# Altium PCB PCB.PcbDoc
Units mm, origin at the board's own origin, x right, y up, seen from the top; angles counter-clockwise.
Board outline 35 x 26 mm, 4 copper layers (Top Layer, Mid Layer 1, Mid Layer 2, Bottom Layer), stack 1.57 mm thick; 62 components, 30 nets, 174 pads, 81 vias.
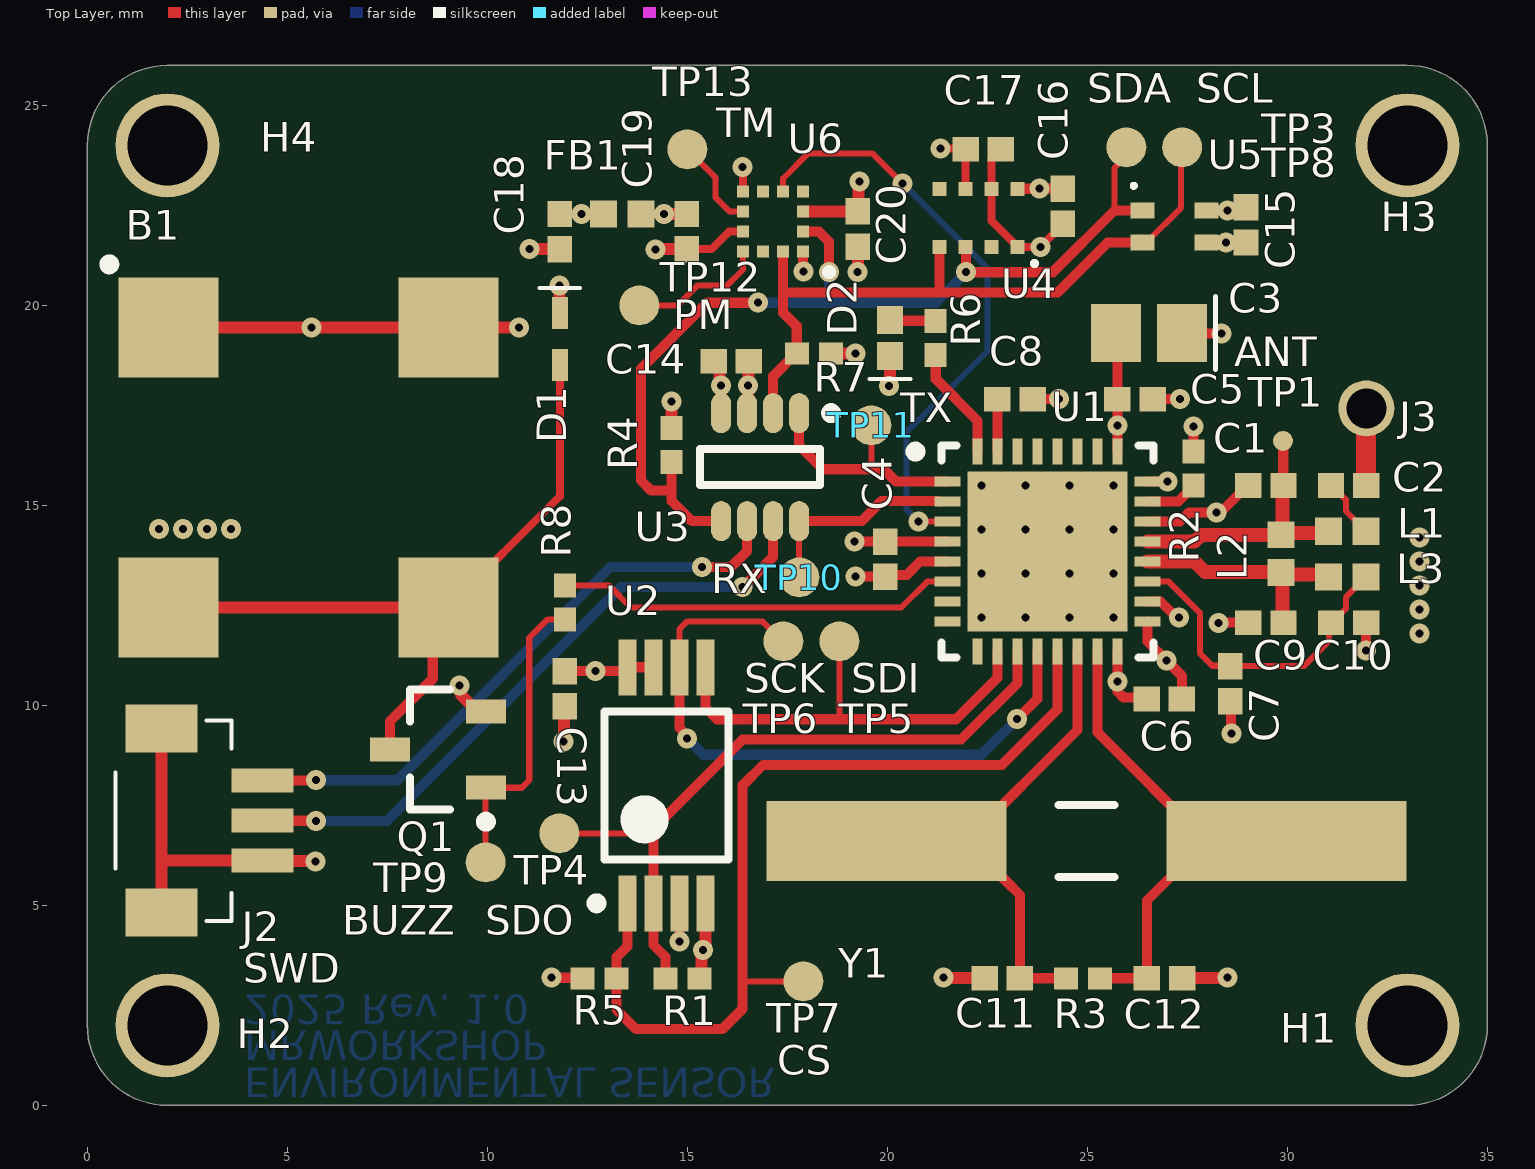
[diagram p0: Top Layer view]
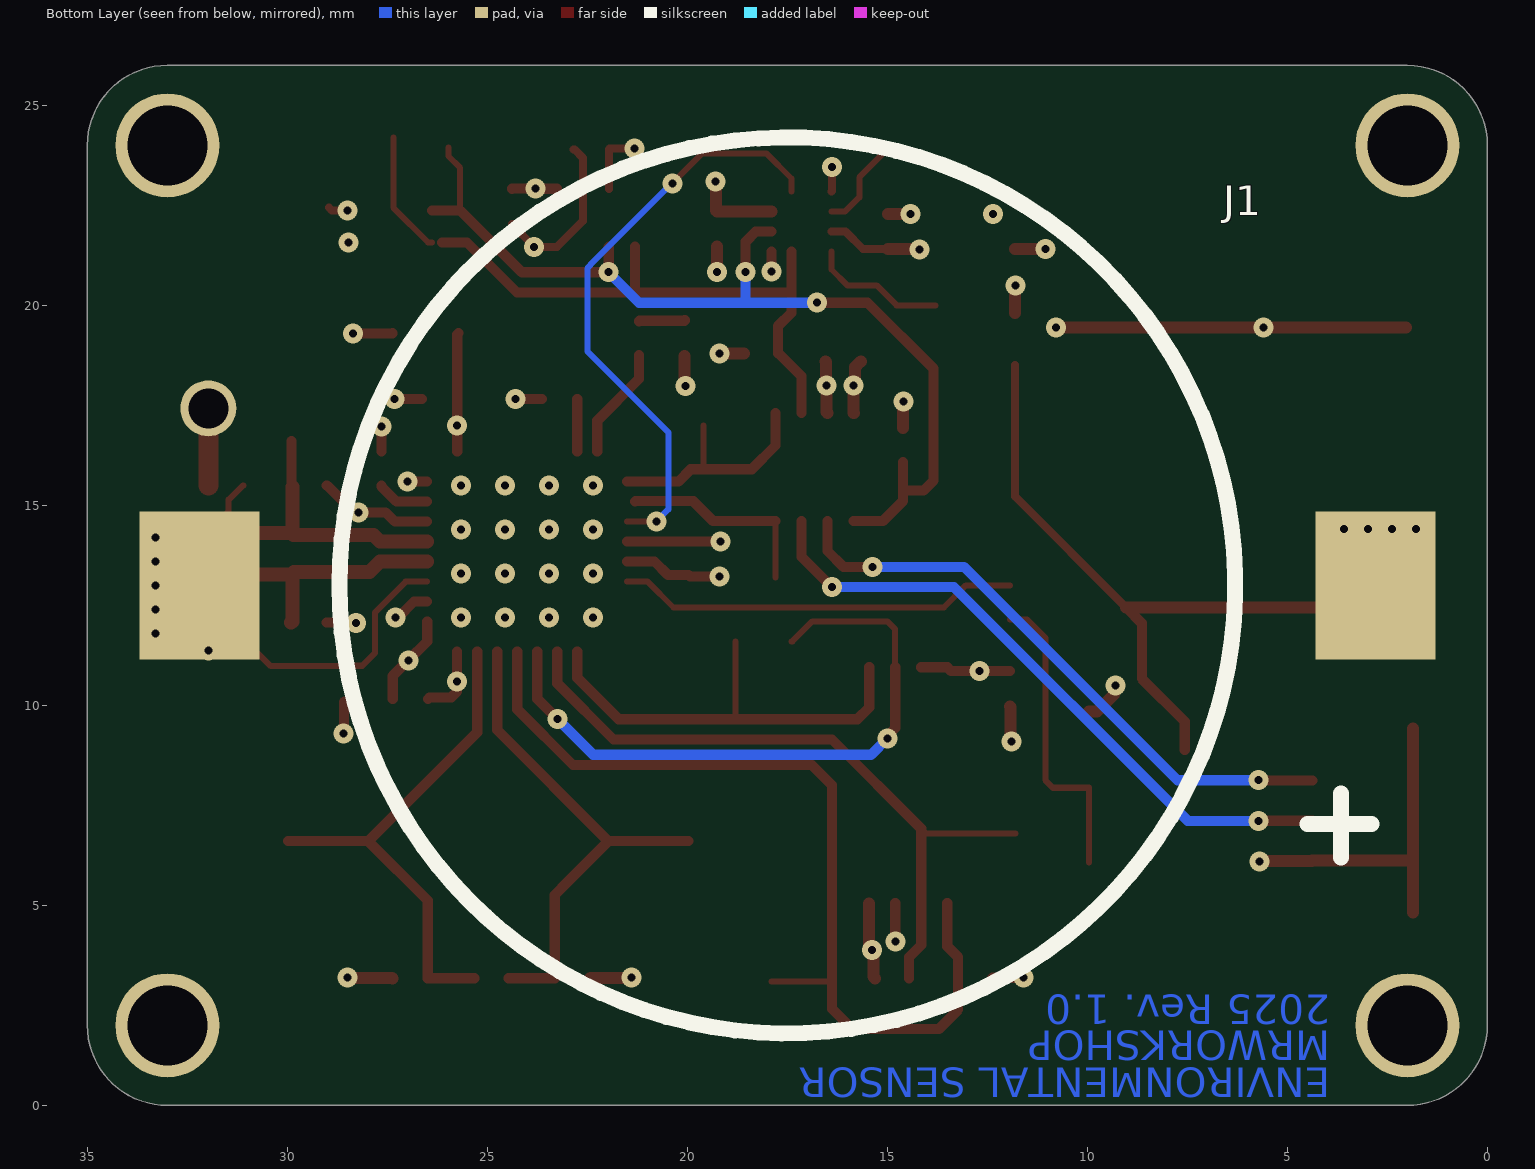
[diagram p1: Bottom Layer view, seen from below]
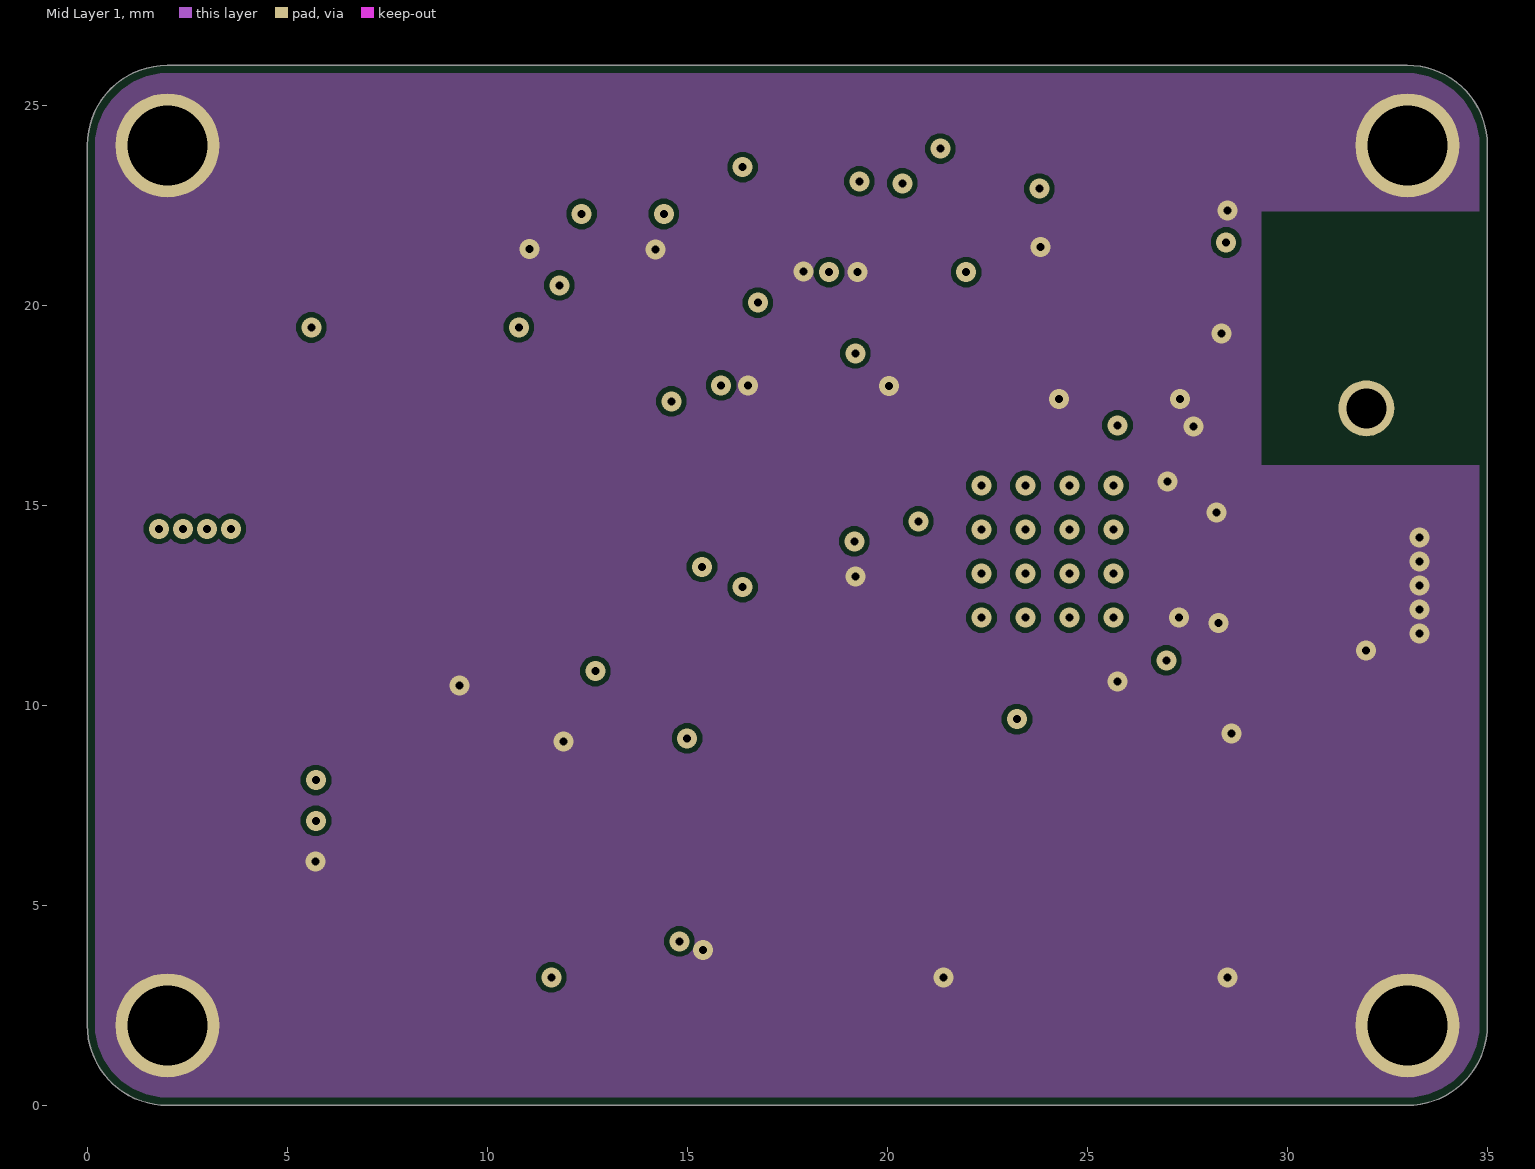
[diagram p2: Mid Layer 1]
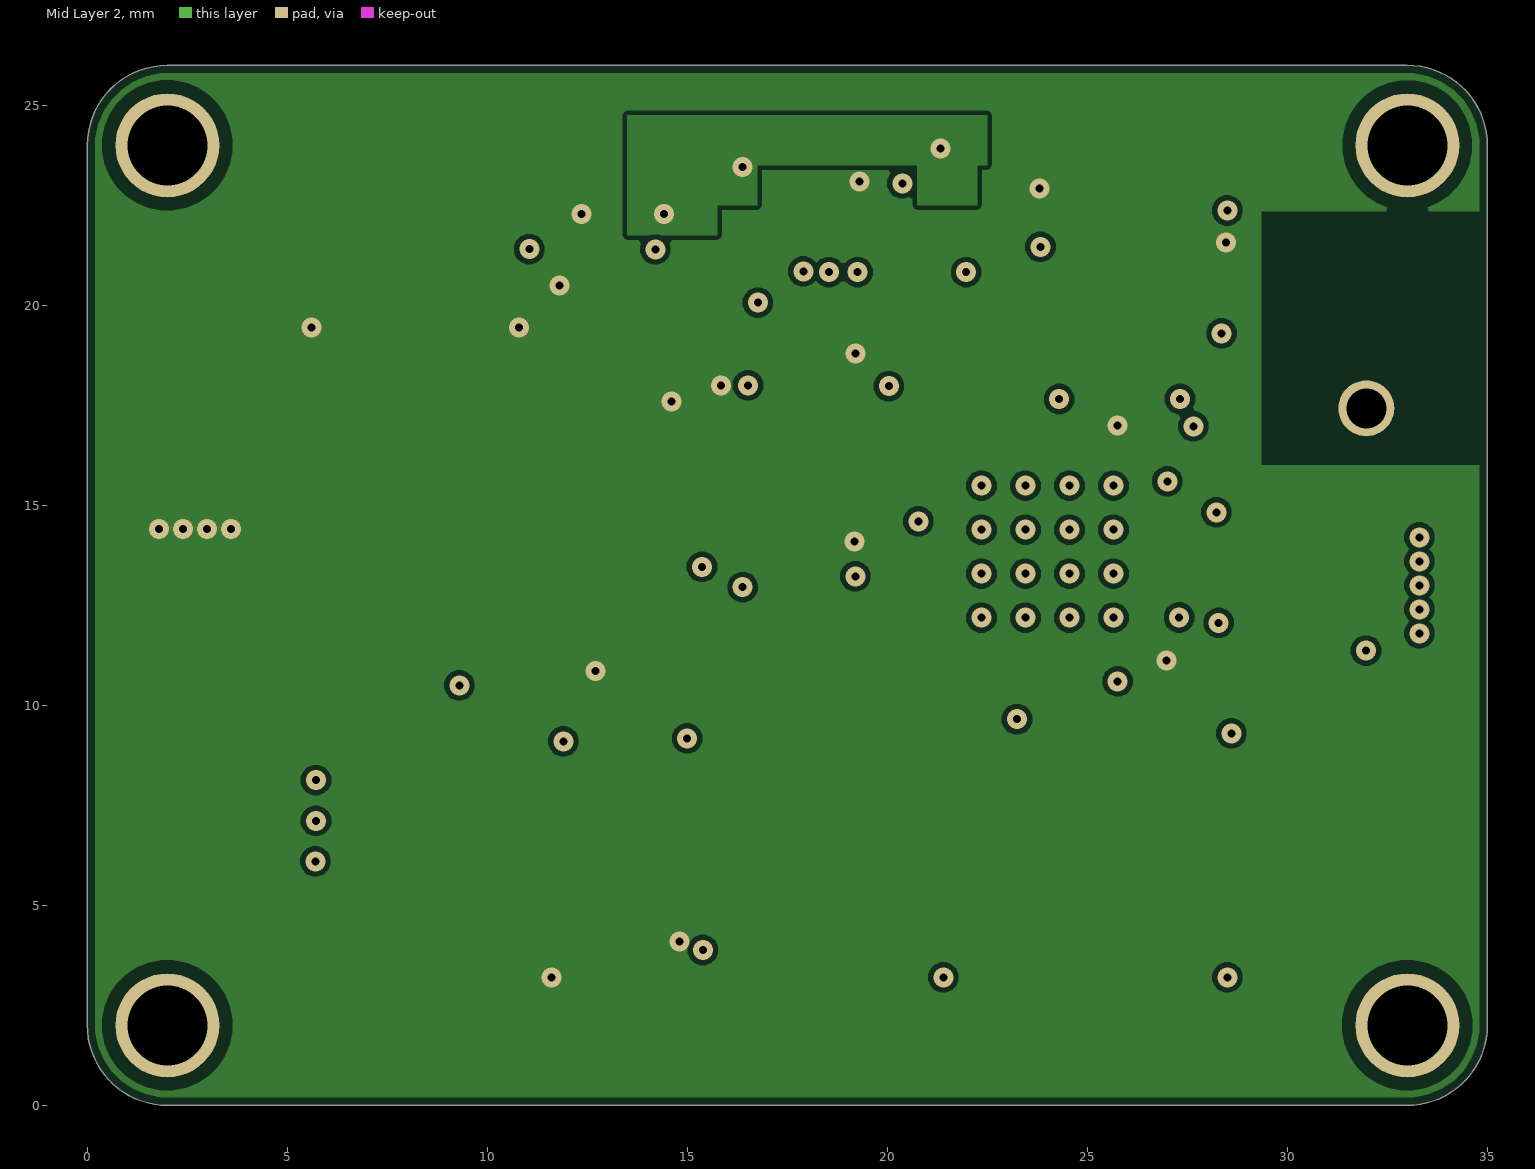
[diagram p3: Mid Layer 2]
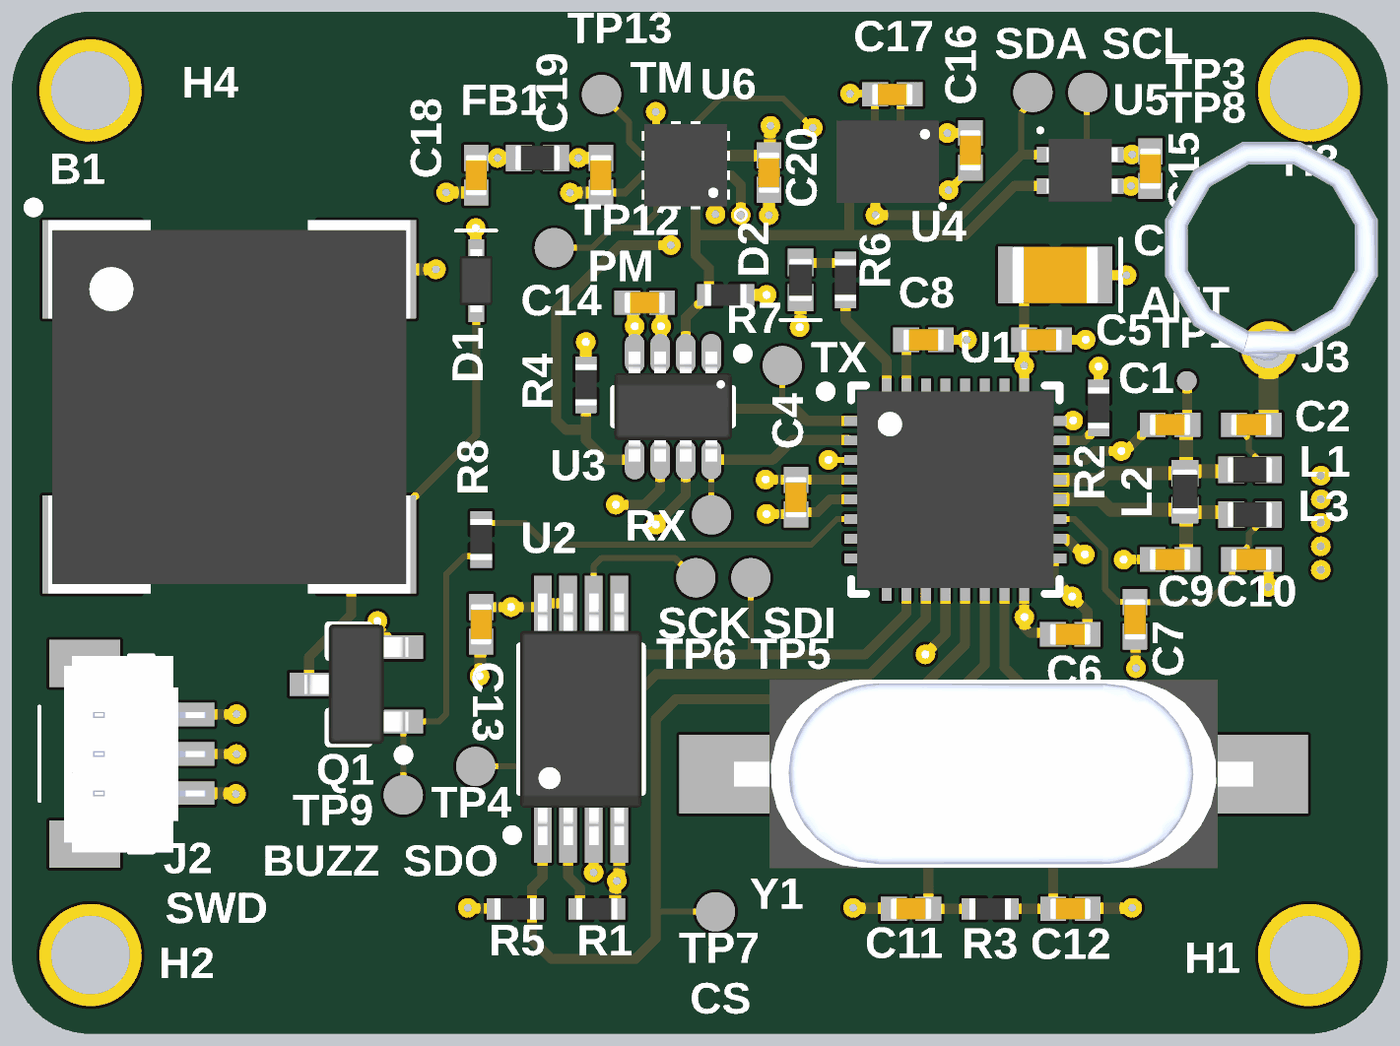
[diagram p4: 3D render of the assembled board from above, using the file's embedded part models]

## Layer stack, top to bottom
Top Solder: solder mask 0.0127, Solder Resist, Dk 3.8
Top Layer: signal copper 0.035
Dielectric 1: prepreg 0.1, 2313, Dk 4.05
Mid Layer 1: signal copper 0.0175
Core: core 1.265, FR-4, Dk 4.5
Mid Layer 2: signal copper 0.0175
Dielectric 2: prepreg 0.1, 2313, Dk 4.05
Bottom Layer: signal copper 0.035
Bottom Solder: solder mask 0.0127, Solder Resist, Dk 3.8

## Board outline
0,2 ccw(c2,2) 2,0 33,0 ccw(c33,2) 35,2 35,24 ccw(c33,24) 33,26 2,26 ccw(c2,24) 0,24

## Design rules (kind name [scope] priority, off if disabled: settings)
BoardOutlineClearance [All] p1: gap=0.2 ignorepadtopadclearanceinfootprint=FALSE
Clearance [All] p1: gap=0.102 ignorepadtopadclearanceinfootprint=FALSE except(0.127: Arc-Via Track-Via SMDPad-Via THPad-Via Via-Via Via-Fill Via-Poly Via-Region Via-Text; 0.25: Arc-Hole Track-Hole SMDPad-Hole THPad-Hole Via-Hole Fill-Hole Poly-Hole Region-Hole Text-Hole)
ComponentClearance [All] p1: gap=0.102 collisioncheckmode=3 verticalgap=0.102 showdistances=TRUE
DiffPairsRouting [All] p1: maxlimit=0.102 minlimit=0.102 mostfreqgap=0.102 toplayer_minwidth=0.102 toplayer_maxwidth=1816.048 toplayer_prefwidth=0.102 midlayer1_minwidth=0.102 midlayer1_maxwidth=1816.048 midlayer1_prefwidth=0.102 midlayer2_minwidth=0.102 midlayer2_maxwidth=1816.048 midlayer2_prefwidth=0.102 bottomlayer_minwidth=0.102 bottomlayer_maxwidth=1816.048 bottomlayer_prefwidth=0.102 maxuncoupledlength=12.7
Height [All] p1: minheight=0 maxheight=1816.048 prefheight=12.7
HoleSize [All] p1: absolutevalues=TRUE maxlimit=6.3 minlimit=0.2 maxpercent=80.000 minpercent=20.000
HoleToHoleClearance [All] p1: gap=0.25 allowstackedmicrovias=FALSE
MinimumAnnularRing [All] p1: minimumring=0.076
MinimumSolderMaskSliver [All] p1: minsoldermaskwidth=0
PlaneClearance [All] p1: clearance=0.102
PlaneConnect PlaneConnectPowerPads [InPadClass('PowerPads')] p1: planeconnectstyle=Direct reliefexpansion=0.508 reliefentries=4 reliefconductorwidth=0.254 reliefairgap=0.254
PlaneConnect [All] p2: pad.planeconnectstyle=Relief pad.reliefexpansion=0.3 pad.reliefentries=4 pad.reliefconductorwidth=0.102 pad.reliefairgap=0.102 via.planeconnectstyle=Direct via.reliefexpansion=0.3 via.reliefentries=4 via.reliefconductorwidth=0.127 via.reliefairgap=0.127
PolygonConnect PolygonConnectPowerPads [All vs (InPadClass('PowerPads'))] p1: connectstyle=Direct reliefconductorwidth=0.254 reliefentries=4 polygonreliefangle="90 Angle" airgapwidth=0.254
PolygonConnect [All] p2: thpad.connectstyle=Relief thpad.reliefconductorwidth=0.102 thpad.reliefentries=4 thpad.polygonreliefangle="90 Angle" thpad.airgapwidth=0.102 smdpad.connectstyle=Relief smdpad.reliefconductorwidth=0.102 smdpad.reliefentries=4 smdpad.polygonreliefangle="90 Angle" smdpad.airgapwidth=0.102 via.connectstyle=Direct via.reliefconductorwidth=0.127 via.reliefentries=4 via.polygonreliefangle="90 Angle" via.airgapwidth=0.127
RoutingVias [All] p1: holewidth=0.2 width=0.45 viastyle="Through Hole" minholewidth=0.2 minwidth=0.45 maxholewidth=6.3 maxwidth=6.55
SilkToSilkClearance [All] p1: silktosilkclearance=0
SilkToSolderMaskClearance [IsPad] p1: minsilkscreentomaskgap=0.102 clearancetoexposedcopper=TRUE
SolderMaskExpansion [All] p1: expansion=0.075 istentingtop=FALSE
SupplyNets "Schematic Supply Nets_3" [InNet('+3V')] p1: voltage=0.000
SupplyNets "Schematic Supply Nets_2" [InNet('GND')] p2: voltage=0.000
SupplyNets "Schematic Supply Nets_1" [InNet('VDDA')] p3: voltage=0.000
Width [All] p1: maxlimit=1816.048 minlimit=0.102 preferedwidth=0.102
20 further rules are at their usual default settings.

## Components (designator, comment, footprint, x,y, rotation, side; value= is the part's Value field where it differs from the comment)
B1 "CMT-8504-03-SMT-TR" CMT-8504-03-SMT-TR 5.532,15.946 r0 top
C1 "GRM1555C2A180FA01D" C_0402 29.464,15.494 r0 top value=18pF
C2 "GRM1555C2A6R8DA01D" C_0402 31.531,15.494 r0 top value=6.8pF
C3 "TMCP0J475MTRF" C_0805_Polarized 26.543,19.304 r0 top value=4.7uF
C4 "GRM155R61A104KA01J" C_0402 19.95,13.65 r90 top
C5 "GRM155R61A104KA01J" C_0402 26.193,17.653 r180 top
C6 "GRM155R61A104KA01J" C_0402 26.924,10.16 r0 top
C7 "GRM1557U1A332JA01D" C_0402 28.575,10.541 r90 top value=3.3nF
C8 "GRM155R70J103KA01D" C_0402 23.193,17.653 r180 top value=10nF
C9 "GRM1555C2A180FA01D" C_0402 29.464,12.065 r0 top value=18pF
C10 "GRM1555C1H181JA01J" C_0402 31.531,12.065 r0 top value=180pF
C11 "GRM1555C1E300GA01D" C_0402 22.875,3.175 r0 top value=30pF
C12 "GRM1555C1E300GA01D" C_0402 26.931,3.175 r180 top value=30pF
C13 "GRM155R61A104KA01J" C_0402 11.938,10.414 r90 top
C14 "GRM155R61A104KA01J" C_0402 16.1,18.6 r180 top
C15 "GRM155R61A104KA01J" C_0402 28.964,22.011 r270 top
C16 "GRM155R61A104KA01J" C_0402 24.384,22.479 r90 top
C17 "GRM155R61A104KA01J" C_0402 22.4,23.9 r180 top
C18 "GRM155R61A104KA01J" C_0402 11.811,21.844 r90 top
C19 "GRM155R61A104KA01J" C_0402 14.986,21.844 r90 top
C20 "GRM155R61A104KA01J" C_0402 19.263,21.908 r90 top
D1 "BAS716,115" SOD523 11.811,19.162 r270 top
D2 "150040RS73240" LED_0402 20.066,19.177 r90 top value=RED
FB1 "BLM15PE471SH1D" L_0402 13.373,22.284 r0 top value=470R
H1 "Mounting_Hole_M2" M2 33,2 r0 top
H2 "Mounting_Hole_M2" M2 2,2 r0 top
H3 "Mounting_Hole_M2" M2 33,24 r0 top
H4 "Mounting_Hole_M2" M2 2,24 r0 top
J1 "SMTU2032-LF.TR" SMTU2032-LF.TR 17.5,13 r0 bottom locked
J2 "BM03B-SRSS-TB(LF)(SN)" BM03B-SRSS-TBT(LF)(SN) 2.032,7.112 r270 top
J3 "Antenna" Antenna_1mm 31.975,17.425 r345 top
L1 "MCLA1005V2-390-R" L_0402 31.496,14.351 r180 top value=39nH
L2 "PE-0402CL120JTT" L_0402 29.845,13.792 r90 top value=12nH
L3 "MCLA1005V2-390-R" L_0402 31.496,13.208 r180 top value=39nH
Q1 "BC850CLT1G" SOT23-3 8.763,8.89 r180 top
R1 "CR0402-FX-4702GLF" R_0402 14.88,3.175 r180 top value=47k
R2 "CR0402-FX-2202GLF" R_0402 27.651,15.919 r270 top value=22k
R3 "CR0402-FX-1004GLF" R_0402 24.892,3.175 r0 top value=1M
R4 "CR0402-FX-4702GLF" R_0402 14.605,16.51 r90 top value=47k
R5 "CR0402-FX-4702GLF" R_0402 12.804,3.175 r180 top value=47k
R6 "CR0402-FX-1001GLF" R_0402 21.209,19.177 r270 top value=1k
R7 "CR0402-FX-4702GLF" R_0402 18.161,18.796 r0 top value=47k
R8 "CR0402-FX-1800GLF" R_0402 11.938,12.573 r270 top value=180R
TP1 "TestPoint_0.5mm" TestPoint_0.5mm 29.891,16.61 r90 top
TP3 "TestPoint_1mm" TestPoint_1mm 25.975,23.95 r90 top
TP4 "TestPoint_1mm" TestPoint_1mm 11.8,6.8 r90 top
TP5 "TestPoint_1mm" TestPoint_1mm 18.8,11.6 r90 top
TP6 "TestPoint_1mm" TestPoint_1mm 17.4,11.6 r90 top
TP7 "TestPoint_1mm" TestPoint_1mm 17.9,3.1 r90 top
TP8 "TestPoint_1mm" TestPoint_1mm 27.371,23.95 r90 top
TP9 "TestPoint_1mm" TestPoint_1mm 9.957,6.073 r90 top
TP10 "TestPoint_1mm" TestPoint_1mm 17.8,13.2 r90 top
TP11 "TestPoint_1mm" TestPoint_1mm 19.6,17 r90 top
TP12 "TestPoint_1mm" TestPoint_1mm 13.8,20 r90 top
TP13 "TestPoint_1mm" TestPoint_1mm 15,23.9 r90 top
U1 "nRF9E5" QFN32L 24.003,13.843 r0 top
U2 "25AA320A-I/ST" TSSOP8 14.478,8.001 r90 top
U3 "MSPM0C1103SDDFR" SOT-23_8 16.82,15.955 r270 top
U4 "DPS310XTSA1" LGA-8L 22.281,22.188 r270 top
U5 "SHT40-BD1B-R2" DFN-SHT4 27.178,21.971 r0 top
U6 "MC6470" QFN12 17.145,22.098 r180 top
Y1 "FOXSDLF/040" Crystal_11.7x5.0 24.975,6.604 r0 top value=4MHz

## Footprints (in the part's own frame and the unit in brackets; to place one, negate y for a bottom-side part, rotate by r counter-clockwise, add the part's x,y. Pads: shape width x height; smd on the part's side, far side on the other; paste and mask are expansions set on the pad)
Antenna_1mm [mm]
  round 1.4 hole 1: 1(0,0)
  body extent -3.4,-0.3 2.2,5.3, height 10.9
BM03B-SRSS-TBT(LF)(SN) [mm]
  rect 1.2x1.8 smd: 0(-2.308,-0.18) 0(2.292,-0.18)
  rect 0.6x1.55 smd: 1(-1.008,2.345) 2(-0.008,2.345) 3(0.992,2.345)
  silkscreen extent -2.51,-1.33 2.5,1.57, body extent -2.5,-0.7 2.5,2.9, height 4.25
C_0402 [mm] "Chip Capacitor, 2-Leads, Body 1.00x0.50mm, IPC Medium Density"
  rect 0.66x0.62 smd: 1(-0.44,0) 2(0.44,0)
  body extent -0.53,-0.28 0.53,0.28, height 0.55
C_0805_Polarized [mm]
  rect 1.25x1.45 smd: 1(-0.825,0) 2(0.825,0)
  silkscreen extent 1.66,-0.91 1.66,0.91, body extent -1.1,-0.72 1.1,0.72, height 1.2
CMT-8504-03-SMT-TR [mm]
  rect 2.5x2.5 smd: +(-3.5,3.5) +(3.5,3.5) -(-3.5,-3.5) -(3.5,-3.5)
  silkscreen extent -5.11,4.95 -4.86,5.2, body extent -4.6,-4.75 4.6,4.75, height 4.5
Crystal_11.7x5.0 [mm]
  rect 6x2 smd: 1(-5,0) 2(5,0)
  silkscreen extent -0.7,-0.9 0.7,0.9, body extent -6.6,-2.39 6.6,2.41, height 4.3
DFN-SHT4 [mm] "DFN, 4-Leads, Body 1.50x1.50mm, Pitch 1.40mm, IPC Medium Density"
  rect 0.6x0.4 smd: 1(-0.8,0.4) 2(-0.8,-0.4) 3(0.8,-0.4) 4(0.8,0.4)
  silkscreen extent -1.07,0.97 -0.97,1.07, body extent -0.85,-0.8 0.95,0.8, height 0.59
L_0402 [mm]
  rect 0.67x0.68 smd: 1(-0.47,0) 2(0.47,0)
  body extent -0.58,-0.33 0.58,0.33, height 0.65
LED_0402 [mm]
  rect 0.7x0.65 smd: 1(-0.45,0) 2(0.45,0)
  silkscreen extent -1.02,-0.51 -1.02,0.51, body extent -0.55,-0.3 0.55,0.3, height 0.5
LGA-8L [mm] "LGA, 8-Leads, Body 2.00x2.50mmx1.00mm, Pitch 0.65mm"
  rect 0.35x0.35 smd: 1(0.725,0.975) 2(0.725,0.325) 3(0.725,-0.325) 4(0.725,-0.975) 5(-0.725,-0.975) 6(-0.725,-0.325) 7(-0.725,0.325) 8(-0.725,0.975)
  silkscreen extent 1.13,1.38 1.16,1.41, body extent -1.05,-1.3 1.05,1.3, height 1
M2 [mm]
  round 2.6 hole 2: 1(0,0)
QFN12 [mm] "QFN, 12-Leads, Body 2.00x2.00mm, Pitch 0.50mm, IPC Medium Density"
  rect 0.3x0.3 smd: 1(-0.75,0.75) 2(-0.75,0.25) 3(-0.75,-0.25) 4(-0.75,-0.75) 5(-0.25,-0.75) 6(0.25,-0.75) 7(0.75,-0.75) 8(0.75,-0.25) 9(0.75,0.25) 10(0.75,0.75) 11(0.25,0.75) 12(-0.25,0.75)
  silkscreen extent -1.45,1.22 -1.35,1.32, body extent -1.12,-1.12 1.12,1.12, height 1
QFN32L [mm] "QFN, 32-Leads, Body 5.00x5.00mm, Pitch 0.50mm, Thermal Pad 4.00x4.00mm, IPC Medium Density"
  rect 0.65x0.25 smd: 1(-2.5,1.75) 2(-2.5,1.25) 3(-2.5,0.75) 4(-2.5,0.25) 5(-2.5,-0.25) 6(-2.5,-0.75) 7(-2.5,-1.25) 8(-2.5,-1.75) 17(2.5,-1.75) 18(2.5,-1.25) 19(2.5,-0.75) 20(2.5,-0.25) 21(2.5,0.25) 22(2.5,0.75) 23(2.5,1.25) 24(2.5,1.75)
  rect 0.25x0.65 smd: 9(-1.75,-2.5) 10(-1.25,-2.5) 11(-0.75,-2.5) 12(-0.25,-2.5) 13(0.25,-2.5) 14(0.75,-2.5) 15(1.25,-2.5) 16(1.75,-2.5) 25(1.75,2.5) 26(1.25,2.5) 27(0.75,2.5) 28(0.25,2.5) 29(-0.25,2.5) 30(-0.75,2.5) 31(-1.25,2.5) 32(-1.75,2.5)
  rect 4x4 smd: 33(0,0)
  silkscreen extent -3.42,-2.65 2.65,2.65, body extent -2.5,-2.5 2.5,2.5, height 0.9
R_0402 [mm]
  rect 0.6x0.55 smd: 1(-0.425,0) 2(0.425,0)
  body extent -0.53,-0.28 0.53,0.28, height 0.37
SMTU2032-LF.TR [mm]
  rect 3x3.7 smd: 1(-14.7,0) 2(14.7,0)
  silkscreen extent -14.6,-11.2 11.2,11.2, body extent -16,-8.05 16,8.05, height 5.55
SOD523 [mm] "SODFL, 2-Leads, Body 0.80x1.60mm, IPC Medium Density"
  rect 0.8x0.4 smd: 1(-0.65,0) 2(0.65,0)
  silkscreen extent -1.27,-0.51 -1.27,0.51, body extent -0.8,-0.43 0.8,0.43, height 0.65
SOT23-3 [mm] "SOT23, 3-Leads, Body 2.92x2.37mm, Pitch 0.95mm, IPC Medium Density"
  rect 1x0.6 smd: 1(-1.2,0.95) 2(-1.2,-0.95) 3(1.2,0)
  silkscreen extent -1.33,-1.5 0.7,1.92, body extent -1.32,-1.52 1.32,1.52, height 1.12
SOT-23_8 [mm]
  oval 1x0.5 smd: 1(-1.35,0.975) 2(-1.35,0.325) 3(-1.35,-0.325) 4(-1.35,-0.975) 5(1.35,-0.975) 6(1.35,-0.325) 7(1.35,0.325) 8(1.35,0.975)
  silkscreen extent -1.47,-1.5 0.45,1.9, body extent -1.4,-1.5 1.4,1.5, height 1.1
TestPoint_0.5mm [mm]
  round 0.5 smd: 1(0,0)
TestPoint_1mm [mm]
  round 1 smd: 1(0,0)
TSSOP8 [mm] "TSOP, 8-Leads, Body 3.00x4.40mm, Pitch 0.65mm, IPC Medium Density"
  rect 1.4x0.45 smd: 1(-2.95,0.975) 2(-2.95,0.325) 3(-2.95,-0.325) 4(-2.95,-0.975) 5(2.95,-0.975) 6(2.95,-0.325) 7(2.95,0.325) 8(2.95,0.975)
  silkscreen extent -3.07,-1.55 1.85,1.87, body extent -3.2,-1.55 3.2,1.55, height 1.2

## Part data
B1: "Piezo Buzzers & Audio Indicators 8.5mmx4mm 3 V, 85 dB, Surface Mount, Transducer", Supplier Part Number 1=2223-CMT-8504-03-SMT-TRCT-ND, Supplier 1=Digikey
C1 C9: "Multilayer Ceramic Capacitors MLCC - SMD/SMT 18 pF 100 VDC 1% 0402 C0G (NP0)", Supplier Part Number 1=81-GRM1555C2A180FA1D, Tolerance=1%, Voltage=100V, Supplier 1=Mouser
C2: "Multilayer Ceramic Capacitors MLCC - SMD/SMT 6.8 pF 100 VDC 0.5 pF 0402 C0G (NP0)", Supplier Part Number 1=81-GRM1555C2A6R8DA1D, Voltage=100V, Supplier 1=Mouser
C3: "Tantalum Capacitors - Solid SMD 7volts 4.7uF 20% Molded Case, 0805", Supplier Part Number 1=74-TMCP0J475MTRF, Tolerance=20%, Voltage=6.3V, Supplier 1=Mouser
C4 C5 C6 C13 C14 C15 C16 C17 C18 C19 C20: "Multilayer Ceramic Capacitors MLCC - SMD/SMT 0.1 uF 10 VDC 10% 0402 X5R", Capacitance=100nF, Supplier Part Number 1=81-GRM15R61A104KA01J, Tolerance=10%, Voltage=10V, Supplier 1=Mouser
C7: "Multilayer Ceramic Capacitors MLCC - SMD/SMT 3300 pF 10 VDC 5% 0402 U2J", Supplier Part Number 1=81-GRM1557U1A332JA1D, Tolerance=5%, Voltage=10V, Supplier 1=Mouser
C8: "Multilayer Ceramic Capacitors MLCC - SMD/SMT 0.01 uF 6.3 VDC 10% 0402 X7R", Supplier Part Number 1=81-GRM155R70J103KA1D, Tolerance=10%, Voltage=6.3V, Supplier 1=Mouser
C10: "Multilayer Ceramic Capacitors MLCC - SMD/SMT 180 pF 50 VDC 5% 0402 C0G (NP0)", Supplier Part Number 1=81-GRM1555C1H181JA1J, Tolerance=5%, Voltage=50V, Supplier 1=Mouser
C11 C12: "Multilayer Ceramic Capacitors MLCC - SMD/SMT 30 pF 25 VDC 2% 0402 C0G (NP0)", Supplier Part Number 1=81-GRM1555C1E300GA1D, Tolerance=2%, Voltage=25V, Supplier 1=Mouser
D1: "Rectifiers BAS716/SOD523/SC-79", Supplier Part Number 1=1661367, If=200mA, Supplier 1=Rs, Vf=0.92V, VRRM=75V
D2: "Single Colour LEDs WL-SMCC SMD MonoChip LED 0402 Red 630nm", Supplier Part Number 1=1766150, Supplier 1=Rs
FB1: "Ferrite Beads 470 OHM 25%", Supplier Part Number 1=81-BLM15PE471SH1D, Tolerance=25%, IDC=750mA, RDC=370mR, Supplier 1=Mouser
J1: "Coin Cell Battery Holders SFC MNT FOR CR2032 485PCS/REEL", Supplier Part Number 1=614-SMTU2032-LF.TR, Supplier 1=Mouser
J2: "Złącze: przewód-płytka; gniazdo; męskie; SH,SR; 1mm; PIN: 3; SMT; 50V", Supplier Part Number 1=BM03B-SRSS-TBT(LF)(SN), Supplier 1="Arrow Electronics"
L1 L3: "RF Inductors - SMD MCLA Auto Chip IND 1005 39nH 2 Pads", Supplier Part Number 1=504-MCLA1005V2-390-R, IDC=200mA, Q=8, RDC=1R, SRF=1200MHz, Supplier 1=Mouser
L2: "RF Inductors - SMD 0402 12nH 300mA DCR=500mOhms RF", Supplier Part Number 1=553-PE-0402CL120JTTCT-ND, IDC=300mA, Q=8, RDC=0.5R, SRF=2700MHz, Supplier 1=Digikey
Q1: "Bipolar Transistors - BJT 100mA 50V NPN", Supplier Part Number 1=464259, Supplier 1=Rs
R1 R4 R5 R7: "Thick Film Resistors - SMD 47K OHM 1%", Power=62.5mW, Supplier Part Number 1=2477012, Tolerance=1%, Voltage=50V, Supplier 1=Rs
R2: "Thick Film Resistors - SMD 22K OHM 1%", Power=62.5mW, Supplier Part Number 1=2477003, Tolerance=1%, Voltage=50V, Supplier 1=Rs
R3: "Thick Film Resistors - SMD 1.0M OHM 1%", Power=62.5mW, Supplier Part Number 1=2476986, Tolerance=1%, Supplier 1=Rs
R6: "Thick Film Resistors - SMD 1.0K OHM 1%", Power=62.5mW, Supplier Part Number 1=2231667, Tolerance=1%, Supplier 1=Rs
R8: "Thick Film Resistors - SMD 180 OHM 1%", Power=62.5mW, Supplier Part Number 1=CR0402-FX-1800GLFCT-ND, Tolerance=1%, Supplier 1=Digikey
U1: library part nRF905, "RF Transceiver 1.9-3.6V 433/868/ 915MHz TRNSCVR", Supplier Part Number 1=8855794, Supplier 1=RS
U2: "EEPROM 32K 4KX8 1.8V SER EE IND", Supplier Part Number 1=25AA320AXT-I/STTR-ND, Supplier 1=Digikey
U3: "ARM Microcontrollers - MCU 24MHz Arm Cortex-M0+ MCU with 8KB flash", Supplier Part Number 1=595-MSPM0C1103SDDFR, Flash=8kB, Supplier 1=Mouser
U4: "Board Mount Pressure Sensors PRESSURE SENSOR & Temperature sensor", Supplier Part Number 1=726-DPS310XTSA1, Supplier 1=Mouser
U5: "Board Mount Humidity Sensors +/-1.8%RH/+/-0.2C, 4th generation, digital (I2C) humidity and temperature sensor with 0x45 I2C address.", Supplier Part Number 1=1649-SHT40-BD1B-R2CT-ND, Supplier 1=Digikey
U6: "IMUs - Inertial Measurement Units 8g, 14-Bit Output 6-Axis eCompass", Supplier Part Number 1=2548-MC6470CT-ND, Supplier 1=Digikey
Y1: "Crystals 4MHz 20pF", Load Capacitance=20pF, Supplier Part Number 1=2063966RL, Tolerance=50ppm, Supplier 1=Farnell

## Via types
v1: diameter 0.5, hole 0.2, Top Layer to Bottom Layer, 81 vias

## Nets (pads, with @x,y where several pads share a name; then routed paths per layer and width w, separated by ;. In a path a pad name is that pad's centre, name@x,y a point inside that pad or via, vN(x,y) a via of type N, cw(c..) or ccw(c..) an arc to the next point about the centre after c; other vN are vias at no path point)
+3V: B1.+ C3.1 C4.2 C5.2 C6.2 C13.2 C14.2 C15.2 C16.2 C18.2 C20.2 D1.1 FB1.1 J1.1 R4.2 R5.2 R7.2 U1.4 U1.17 U1.25 U2.3 U2.7 U2.8 U3.4 U4.8 U5.3 U6.3 | length 27
  Top Layer w0.254: v1(11.6,3.2) 11.612,3.188 12.366,3.188 R5.2 ; C13.2 v1(12.7,10.854) 13.406,10.854 U2.8 U2.7 ; v1(14.8,4.1) 14.802,4.102 14.802,5.05 U2.3 ; v1(19.175,14.1) 19.18,14.095 19.937,14.095 19.939,14.093 U1.4 ; U4.8 23.259,22.916 v1(23.8,22.916) 23.802,22.918 24.379,22.918 24.381,22.916 C16.2 ; C3.1 25.753,19.269 C5.2 v1(25.753,17) U1.25 ; U1.17 26.503,11.597 v1(26.975,11.125) 27.364,10.736 C6.2
  Top Layer w0.3: B1.+@2.032,19.446 v1(5.6,19.446) 9.032,19.446 10.787,19.446 v1(10.789,19.448) ; v1(11.8,20.5) 11.806,20.494 11.806,19.817 D1.1 ; v1(14.6,17.6) 14.603,17.597 14.603,16.937 R4.2 ; C14.2 15.807,18.453 15.807,18.038 v1(15.845,18) U3.4 U3.4@15.839,17.311 ; U6.3 C20.2 19.282,22.366 19.282,23.082 v1(19.3,23.1) ; R7.2 18.588,18.798 19.198,18.798 v1(19.2,18.8)
  other v1: 1.787,14.412 2.388,14.412 2.987,14.412 3.588,14.412 28.471,21.571 12.357,22.284
ACC_INT: U1.3 U6.5 | length 14.9
  Top Layer w0.15: U6.5 17.395,23.17 18.025,23.8 19.625,23.8 v1(20.375,23.05) ; v1(20.775,14.6) 20.779,14.596 21.5,14.596 U1.3
  Bottom Layer w0.15: v1(20.375,23.05) 20.388,23.05 22.423,21.015 22.423,21.002 22.5,20.925 22.5,18.85 20.475,16.825 20.475,14.9 v1(20.775,14.6)
ALERT: R6.2 U1.32 | length 2.8
  Top Layer w0.254: R6.2 21.209,18.161 22.253,17.117 U1.32
ANT: C7.2 C10.1 L3.1 U1.19 | length 8.3
  Top Layer w0.152: U1.19 27.039,13.093 27.813,12.319 27.813,11.303 28.126,10.99 28.566,10.99 C7.2 30.412,10.981 31.047,11.616 31.047,12.021 C10.1 31.111,12.065 31.463,12.417 31.463,12.7 31.966,13.203 L3.1
ANT1: C9.2 L2.1 L3.2 U1.20 | length 5.9
  Top Layer w0.349: U1.20 27.682,13.593 27.94,13.335 29.832,13.335 L2.1 L2.1@29.875,13.293 ; C9.2 29.875,12.094 L2.1@29.875,13.293 ; L3.2 30.969,13.265 29.902,13.265 L2.1@29.875,13.293
ANT2: C1.2 L1.2 L2.2 TP1.1 U1.21 | length 7
  Top Layer w0.254: C1.2@29.875,15.465 29.898,15.488 29.898,16.603 TP1.1
  Top Layer w0.349: U1.21 27.682,14.093 27.851,14.262 L2.2 L2.2@29.875,14.292 ; C1.2@29.875,15.465 L2.2@29.875,14.292 ; L1.2 30.982,14.307 29.889,14.307 L2.2@29.875,14.292
BUZZER: R8.1 U1.6 | length 10.1
  Top Layer w0.152: R8.1 13.037,12.998 13.589,12.446 20.346,12.446 20.993,13.093 U1.6
FLASH_\C\S\: R5.1 TP7.1 U1.13 U2.1 | length 23.5
  Top Layer w0.15: 16.383,3.1 TP7.1
  Top Layer w0.254: U2.1 13.503,3.978 13.229,3.704 R5.1 13.229,2.392 13.716,1.905 15.875,1.905 16.383,2.413 16.383,3.1 16.383,8.001 16.891,8.509 22.86,8.509 24.253,9.902 U1.13
FLASH_SCK: TP6.1 U1.12 U2.6 | length 16.4
  Top Layer w0.15: U2.6 14.803,11.903 15,12.1 16.875,12.1 17.375,11.6 TP6.1
  Top Layer w0.254: U2.6 14.803,9.432 14.994,9.241 v1(14.994,9.174) ; v1(23.241,9.652) 23.753,10.164 U1.12
  Bottom Layer w0.254: v1(14.994,9.174) 15.405,8.763 22.352,8.763 v1(23.241,9.652)
FLASH_SDI: TP5.1 U1.10 U2.5 | length 11.5
  Top Layer w0.15: 18.732,9.652 18.8,9.72 TP5.1
  Top Layer w0.254: U2.5 15.453,9.947 15.748,9.652 18.732,9.652 21.717,9.652 22.753,10.688 U1.10
FLASH_SDO: R1.2 TP4.1 U1.11 U2.2 | length 17.7
  Top Layer w0.15: TP4.1 14.039,6.8 14.153,6.914
  Top Layer w0.254: R1.2 14.455,3.706 14.153,4.008 U2.2 14.153,6.914 16.383,9.144 21.844,9.144 23.253,10.553 U1.11
GND: C1.1 C3.2 C4.1 C5.1 C6.1 C7.1 C8.1 C9.1 C10.2 C11.1 C12.1 C13.1 C14.1 C15.1 C16.1 C17.1 C18.1 C19.1 C20.1 D2.1 H1.1 H2.1 H3.1 H4.1 J1.2 J2.0 J2.3 Q1.2 R1.1 R2.1 U1.5 U1.16 U1.18 U1.22 U1.24 U2.4 U3.3 U4.1 U4.7 U5.4 U6.1 U6.9 | length 39.5
  Top Layer w0.2: C19.1 15.604,21.404 16.048,21.848 U6.9 ; C17.1 22.82,23.9 22.606,23.686 U4.7 22.606,22.113 U4.1 v1(23.828,21.463) 24.384,22.019 C16.1 ; v1@28.4,22.371 v1(28.5,22.371) 28.884,22.371 C15.1
  Top Layer w0.25: U6.1 17.898,21.345 17.898,20.852 v1(17.9,20.85) ; v1(19.2,13.225) 19.208,13.217 19.93,13.217 19.976,13.264 20.489,13.264 20.818,13.593 U1.5 ; C8.1 24.294,17.653 v1(24.297,17.656) ; v1@25.753,10.6 U1.16 ; v1(25.757,10.6) 25.753,10.596 25.753,10.347 25.9,10.2 26.444,10.2 C6.1 ; U1.18 26.83,12.593 27.228,12.196 v1(27.296,12.196) ; U1.22 27.314,14.593 27.546,14.825 v1(28.225,14.825) 28.273,14.873 28.383,14.873 29.004,15.494 C1.1 ; U1.24 26.992,15.593 v1(26.999,15.6) ; C5.1 27.311,17.653 v1(27.318,17.66) ; C3.2 27.372,19.3 v1(28.358,19.3) ; R2.1 v1(27.65,16.975) ; v1(28.282,12.06) 28.287,12.065 C9.1 ; C7.1 28.587,10.089 28.587,9.313 v1(28.6,9.3) ; v1(31.967,11.368) 31.971,11.371 C10.2
  Top Layer w0.3: J2.0@1.852,4.82 1.852,6.2 ; J2.0@1.852,9.42 1.852,6.2 ; v1(5.7,6.1) 5.69,6.11 4.387,6.11 J2.3 1.932,6.12 1.852,6.2 ; v1(9.3,10.5) 9.338,10.462 9.338,10.265 9.763,9.84 Q1.2 ; v1(11.049,21.405) 11.051,21.404 C18.1 ; v1(11.9,9.1) 11.919,9.119 11.919,9.955 C13.1 ; v1(14.2,21.4) 14.202,21.402 14.984,21.402 C19.1 ; R1.1 15.35,3.22 15.35,3.845 v1(15.388,3.883) ; v1@15.453,3.953 U2.4 ; U3.3 16.518,17.327 v1(16.518,18) 16.529,18.011 16.529,18.589 C14.1 ; v1(19.256,20.828) 19.263,20.835 C20.1 ; v1(20.04,17.977) 20.066,18.003 D2.1 ; v1(21.4,3.2) 21.412,3.188 22.423,3.188 C11.1 ; C12.1 27.383,3.188 28.487,3.188 v1(28.5,3.2)
  other v1: 33.3,11.8 33.3,12.4 33.3,13 33.3,13.6 33.3,14.2
I2C_SCL: R7.1 TP8.1 U3.2 U4.4 U5.2 U6.12 | length 17.8
  Top Layer w0.15: U5.2 26.478,21.571 27.348,22.441 TP8.1@27.348,24.2
  Top Layer w0.254: U3.2 17.145,18.23 17.711,18.796 R7.1 17.736,19.475 17.395,19.816 17.395,20.32 ; U6.12 17.395,20.32 ; 21.306,20.469 U4.4 ; U5.2@26.132,21.571 25.508,21.571 24.257,20.32 17.395,20.32
I2C_SDA: R4.1 TP3.1 U3.5 U4.3 U5.1 U6.2 | length 24.9
  Top Layer w0.15: 25.679,22.371 25.679,23.437 25.975,23.733 TP3.1
  Top Layer w0.25: 25.679,22.371 U5.1
  Top Layer w0.254: R4.1 14.605,15.367 ; U3.5 15.113,14.605 14.605,15.113 14.605,15.367 ; v1(16.764,20.066) 15.494,20.066 13.843,18.415 13.843,15.621 14.097,15.367 14.605,15.367 ; U6.2 17.914,21.848 17.918,21.844 18.288,21.844 18.542,21.59 v1(18.542,20.828) ; U4.3 21.964,21.455 21.964,20.835 v1(21.971,20.828) 24.136,20.828 25.679,22.371
  Bottom Layer w0.254: v1(16.764,20.066) 18.542,20.066 ; v1(18.542,20.828) 18.542,20.066 ; v1(21.971,20.828) 21.209,20.066 18.542,20.066
NetB1_-: B1.- Q1.3 | length 18.4
  Top Layer w0.2: B1.-@9.032,12.446 11.811,15.225 11.811,18.512
  Top Layer w0.254: Q1.3 7.563,9.595 8.636,10.668 8.636,12.05 B1.-@9.032,12.446
  Top Layer w0.3: B1.-@2.032,12.446 B1.-@9.032,12.446
NetC2_1: C2.1 L1.1 | length 1.5
  Top Layer w0.15: C2.1 31.111,15.494 31.464,15.141 31.464,14.858 31.966,14.356 L1.1
NetC2_2: C2.2 J3.1 | length 1.9
  Top Layer w0.5: C2.2 J3.1@31.971,17.425
NetC8_2: C8.2 U1.31 | length 1.3
  Top Layer w0.254: U1.31 C8.2
NetD2_2: D2.2 R6.1 | length 1.2
  Top Layer w0.254: D2.2 20.079,19.614 21.197,19.614 R6.1
NetQ1_1: Q1.1 R8.2 TP9.1 | length 7.7
  Top Layer w0.15: TP9.1 9.957,7.934 Q1.1
  Top Layer w0.152: Q1.1 10.861,7.94 11.049,8.128 11.049,11.684 11.513,12.148 R8.2
NetR2_2: R2.2 U1.23 | length 1.3
  Top Layer w0.25: U1.23 27.275,15.093 27.651,15.469 R2.2
NetTP12_1: TP12.1 U6.10 | length 3.4
  Top Layer w0.15: TP12.1 14.765,20 15.265,20.5 16,20.5 16.395,20.895 U6.10
NetTP13_1: TP13.1 U6.8 | length 2.3
  Top Layer w0.15: TP13.1 15.7,23.2 15.7,22.7 16.052,22.348 U6.8
SWCLK: J2.2 U3.7 | length 16.4
  Top Layer w0.254: J2.2 4.381,7.116 5.711,7.116 v1(5.715,7.112) ; v1(16.383,12.954) 17.145,13.716 U3.7
  Bottom Layer w0.254: v1(5.715,7.112) 7.493,7.112 13.335,12.954 v1(16.383,12.954)
SWDIO: J2.1 U3.6 | length 15.2
  Top Layer w0.254: J2.1 4.381,8.124 5.711,8.124 v1(5.715,8.128) ; v1(15.367,13.462) 16.098,13.462 16.495,13.859 U3.6
  Bottom Layer w0.254: v1(5.715,8.128) 7.747,8.128 13.081,13.462 v1(15.367,13.462)
UART_RX: TP10.1 U1.2 U3.8 | length 5.1
  Top Layer w0.15: U3.8 17.798,14.603 17.798,13.202 TP10.1
  Top Layer w0.254: U3.8 19.353,14.605 19.852,15.104 21.296,15.104 U1.2@21.305,15.095
UART_TX: TP11.1 U1.1 U3.1 | length 6
  Top Layer w0.15: 19.6,15.9 TP11.1
  Top Layer w0.254: U3.1 17.795,16.495 18.39,15.9 19.6,15.9 19.914,15.9 20.221,15.593 U1.1
VDDA: C17.2 C19.2 FB1.2 U4.6 U6.7 | length 2.8
  Top Layer w0.2: v1(16.382,23.455) 16.388,23.448 16.388,22.855 U6.7 ; v1(21.326,23.918) 21.942,23.918 C17.2 21.956,23.896 U4.6
  Top Layer w0.3: v1(14.414,22.284) C19.2
XC1: C11.2 R3.1 U1.14 Y1.1 | length 13
  Top Layer w0.254: Y1.1 Y1.1@21.975,6.604 ; R3.1 C11.2 23.316,5.259 22.987,5.588 22.987,5.592 Y1.1@21.975,6.604 ; U1.14 24.753,9.382 Y1.1@21.975,6.604
XC2: C12.2 R3.2 U1.15 Y1.2 | length 13.1
  Top Layer w0.254: U1.15 25.253,9.326 Y1.2@27.975,6.604 ; R3.2 C12.2 26.491,5.12 Y1.2@27.975,6.604 ; Y1.2 Y1.2@27.975,6.604
pads on no net: D1.2 U1.7 U1.8 U1.9 U1.26 U1.27 U1.28 U1.29 U1.30 U1.33 U4.2 U4.5 U6.4 U6.6 U6.11
copper on no net:
  other v1: 22.353,12.193 23.453,12.193 24.553,12.193 25.653,12.193 22.353,13.293 23.453,13.293 24.553,13.293 25.653,13.293 22.353,14.393 23.453,14.393 24.553,14.393 25.653,14.393 22.353,15.493 23.453,15.493 24.553,15.493 25.653,15.493

## Polygon pours and split planes (outlines as drawn)
+3V on Mid Layer 2 "+3V_L03_P003" (solid, pour order 3): 0,0 35,0 35,26 0,26
VDDA on Mid Layer 2 "VDDA_L03_P002" (solid, pour order 2): 13.5,21.75 15.75,21.75 15.75,22.5 16.75,22.5 16.75,23.5 20.75,23.5 20.75,22.5 22.25,22.5 22.25,23.5 22.5,23.5 22.5,24.75 13.5,24.75
GND on Mid Layer 1 "GND_L02_P001" (solid, pour order 1): 0,0 35,0 35,26 0,26

## Other copper
Mid Layer 1:
  pour cut-out: 29.35,16 35,16 35,22.35 29.35,22.35
Mid Layer 2:
  pour cut-out: 29.35,16 35,16 35,22.349 29.35,22.349
Bottom Layer:
  text "2025 Rev. 1.0" at 3.925,3.01 h1.27 r180
  text "MRWORKSHOP" at 3.925,2.11 h1.27 r180
  text "ENVIRONMENTAL SENSOR" at 3.925,1.185 h1.27 r180

## Silkscreen, mask and mechanical layers (free items; w line width, h text height)
Top Overlay:
  text "SDA" at 25,24.815 h1.27
  text "SCL" at 27.725,24.815 h1.27
  text "TM" at 15.725,23.95 h1.27
  text "PM" at 14.65,19.15 h1.27
  text "ANT" at 28.675,18.225 h1.27
  text "TX" at 20.325,16.825 h1.27
  text "RX" at 15.6,12.55 h1.27
  text "SCK" at 16.425,10.065 h1.27
  text "SDI" at 19.1,10.065 h1.27
  text "BUZZ" at 6.375,4.015 h1.27
  text "SDO" at 9.95,4.015 h1.27
  text "SWD" at 3.9,2.815 h1.27
  text "CS" at 17.25,0.515 h1.27
Bottom Solder:
  text "2025 Rev. 1.0" at 3.925,3.01 h1.27 r180
  text "MRWORKSHOP" at 3.925,2.11 h1.27 r180
  text "ENVIRONMENTAL SENSOR" at 3.925,1.185 h1.27 r180
Mechanical 1:
  the board outline again, w0.2